# EAGLE board CheckBatteryVoltage12VoltsWithReset(for AI) (EAGLE 9.6.2)

No outline drawn. Coordinates in mm, seen from the top.
Copper layers (1*16): Top 0.035mm / dielectric 1.5mm / Bottom 0.035mm
Design rules "default": minimum track width 10mil, minimum drill 24mil, track to track 8mil, track to pad 8mil, pad to pad 8mil, via to via 8mil, smd to smd 8mil, copper to edge 40mil, drill to drill 8mil, minimum pad ring 10mil, minimum via ring 8mil, stop-mask expansion 4mil, vias tented up to drill 0mil, thermal gap 10mil

## Footprints (pad centres in the part's own frame; a part is rotated, then mirrored left to right if it is on the bottom)
P1-13Y = drill 1.321 pad 1.905 long: TP 0,0
RTRIM3296W = drill 0.61: 1 0,-2.54; 2 0,0; 3 0,2.54
USB-MICRO-PCB = drill 0.85 pad 1.422 long: P$1 -5.08,6.35; P$2 -2.54,6.35; P$3 0,6.35; P$4 2.54,6.35; P$5 5.08,6.35; P$6 -5.08,-1.47; P$7 5.08,-1.47
TL1105 = drill 1 pad 1.676: 1 -2.25,3.25; 2 2.25,3.25; 3 -2.25,-3.25; 4 2.25,-3.25
DIL08 = drill 0.813 long: 1 -3.81,-3.81; 2 -1.27,-3.81; 3 1.27,-3.81; 4 3.81,-3.81; 5 3.81,3.81; 6 1.27,3.81; 7 -1.27,3.81; 8 -3.81,3.81
ZDIO-7.5 = drill 0.813 octagon: A 3.81,0; C -3.81,0
0204/7 = drill 0.813 octagon: 1 -3.81,0; 2 3.81,0
C025-024X044 = drill 0.813 octagon: 1 -1.27,0; 2 1.27,0
DIL06 = drill 0.813 long: 1 -2.54,-3.81; 2 0,-3.81; 3 2.54,-3.81; 4 2.54,3.81; 5 0,3.81; 6 -2.54,3.81
2,54/0,8 = drill 0.813 pad 2.54 octagon: 1 0,0
1,6/0,8 = drill 0.813 pad 1.6 octagon: 1 0,0

## Placement (x,y rotation side)
E$1  [P1-13Y]  9.22,29.34 270 top
E$2  500  [RTRIM3296W]  47.2,33.4 270 top
E$3  [USB-MICRO-PCB]  57.8,49.8 180 top
E$4  [USB-MICRO-PCB]  24.6,51.8 180 top
E$5  500  [RTRIM3296W]  62.6,33.2 270 top
E$6  [P1-13Y]  39.23,40.13 270 top
E$7  [P1-13Y]  32.83,39.94 270 top
E$8  [TL1105]  61.33,20.78 90 top
E$9  Attiny85  [DIL08]  36.47,24.3 270 top
E$10  zener 10v  [ZDIO-7.5]  28.82,11.04 90 top
E$11  100K  [0204/7]  25.44,24.34 90 top
E$12  [C025-024X044]  9.2,36.8 0 top
E$13  220  [0204/7]  25.1,11.04 270 top
E$14  220  [0204/7]  13.57,14.7 90 top
E$15  Til113  [DIL06]  18.98,11.7 180 top
E$16  [P1-13Y]  9.22,8.32 270 top
E$19  [P1-13Y]  9.22,24.25 270 top
E$32  [P1-13Y]  9.22,21.71 270 top
E$33  [P1-13Y]  9.22,10.87 270 top
E$37  [P1-13Y]  9.22,13.4 270 top
E$51  [2,54/0,8]  48.93,7.32 270 top
E$54  [2,54/0,8]  32.42,14.94 270 top
E$55  [2,54/0,8]  32.42,7.32 270 top
E$56  [P1-13Y]  46.88,20.17 270 top
E$57  [P1-13Y]  46.88,25.25 270 top
E$58  [P1-13Y]  46.88,22.71 270 top
E$63  220  [0204/7]  13.57,24.55 90 top
E$64  Til113  [DIL06]  19.29,24.19 180 top
E$65  [P1-13Y]  9.22,26.8 270 top
E$81  zener 4.7v  [ZDIO-7.5]  23.96,33.41 180 top
E$82  47  [0204/7]  35.37,33.3 0 top
E$90  [1,6/0,8]  25.4,28.2 270 bottom
E$99  [1,6/0,8]  15.1,70.9 90 top
E$100  [1,6/0,8]  8.4,68.8 90 top
E$109  [1,6/0,8]  13.6,28.3 90 top
E$110  [1,6/0,8]  13.5,10.9 90 top
E$111  [1,6/0,8]  25.1,14.8 90 top
E$112  [1,6/0,8]  28.8,14.9 90 top
E$113  [1,6/0,8]  25.4,20.5 90 top
E$114  [1,6/0,8]  25.1,7.2 90 top
E$115  [1,6/0,8]  28.8,7.2 90 top
E$117  [1,6/0,8]  41.16,69.83 90 top
E$119  [1,6/0,8]  13.6,20.8 90 top
E$120  [1,6/0,8]  13.6,18.5 90 top
STEP-UP-GND-OUT  [2,54/0,8]  48.93,14.94 270 top

## Library data of the parts
E$1 E$6 E$7 E$16 E$19 E$32 E$33 E$37 E$56-E$58 E$65 = testpad
E$2 E$5 E$12 = rcl
E$3 E$4 = LSGPackages
E$8 = switch
E$9 = 74xx-us
E$10 E$81 = ref-packages-longpad
E$11 E$13 E$14 E$63 E$82 = eagle-ltspice
E$15 E$64 = ic-package
E$51 E$54 E$55 E$90 E$99 E$100 E$109-E$115 E$117 E$119 E$120 STEP-UP-GND-OUT = wirepad

## Nets
5.1V-STEP-UP: E$2.2 E$9.8 E$51.1 E$64.5
IN-5V-FROM-NANO-SDCARD: E$15.5 E$16.TP E$33.TP
IN-12V-BATTERY: E$10.C E$55.1 E$56.TP E$58.TP
IN-GND-BATTERY: E$54.1 E$57.TP
IN-GND-NANO-SD-CARD: E$14.2 E$19.TP E$32.TP E$63.1
IN-TO-RESET-ATTINY85: E$1.TP E$64.1 E$65.TP
OUT-SERIAL-DATA: E$14.1 E$15.4 E$37.TP
PHOTO-DIODE: E$13.2 E$15.2
S$2: E$2.1 E$82.2
S$5: E$9.1 E$64.4
S$15: E$63.2 E$64.2
STEP-UP-GND: E$9.4 E$11.2 E$13.1 E$81.A STEP-UP-GND-OUT.1
TX-SERIAL-DATA: E$9.2 E$15.1
VZ-ANALOG-REFERENCE: E$9.5 E$81.C E$82.1
VZ-BATTERY-LEVEL: E$9.3 E$10.A E$11.1

## Tracks (layer width: path | path; a pad name or v marks a point on that pad's centre or on a via)
5.1V-STEP-UP  (3 unrouted)
IN-5V-FROM-NANO-SDCARD  (2 unrouted)
IN-12V-BATTERY  (3 unrouted)
IN-GND-BATTERY  (1 unrouted)
IN-GND-NANO-SD-CARD  (3 unrouted)
IN-TO-RESET-ATTINY85  (2 unrouted)
OUT-SERIAL-DATA  (2 unrouted)
PHOTO-DIODE  (1 unrouted)
S$2  (1 unrouted)
S$5  (1 unrouted)
S$15  (1 unrouted)
STEP-UP-GND  (4 unrouted)
TX-SERIAL-DATA  (1 unrouted)
VZ-ANALOG-REFERENCE  (2 unrouted)
VZ-BATTERY-LEVEL  (2 unrouted)

## Text on the board
tPlace: Batt.- | Batt.+ | In- | Out- | In+ | Out+
bPlace: Reset | Gnd | Demux | Vcc
tValues: reset in | serial to multi